# Altium PCB LMR14050.PcbDoc
Units mil, origin at the board's own origin, x right, y up, seen from the top; angles counter-clockwise.
Board outline 1355 x 1215 mil, 4 copper layers (Top Layer, GND1, GND2, Bottom Layer), stack 23.756 mil thick; 20 components, 9 nets, 47 pads, 214 vias.
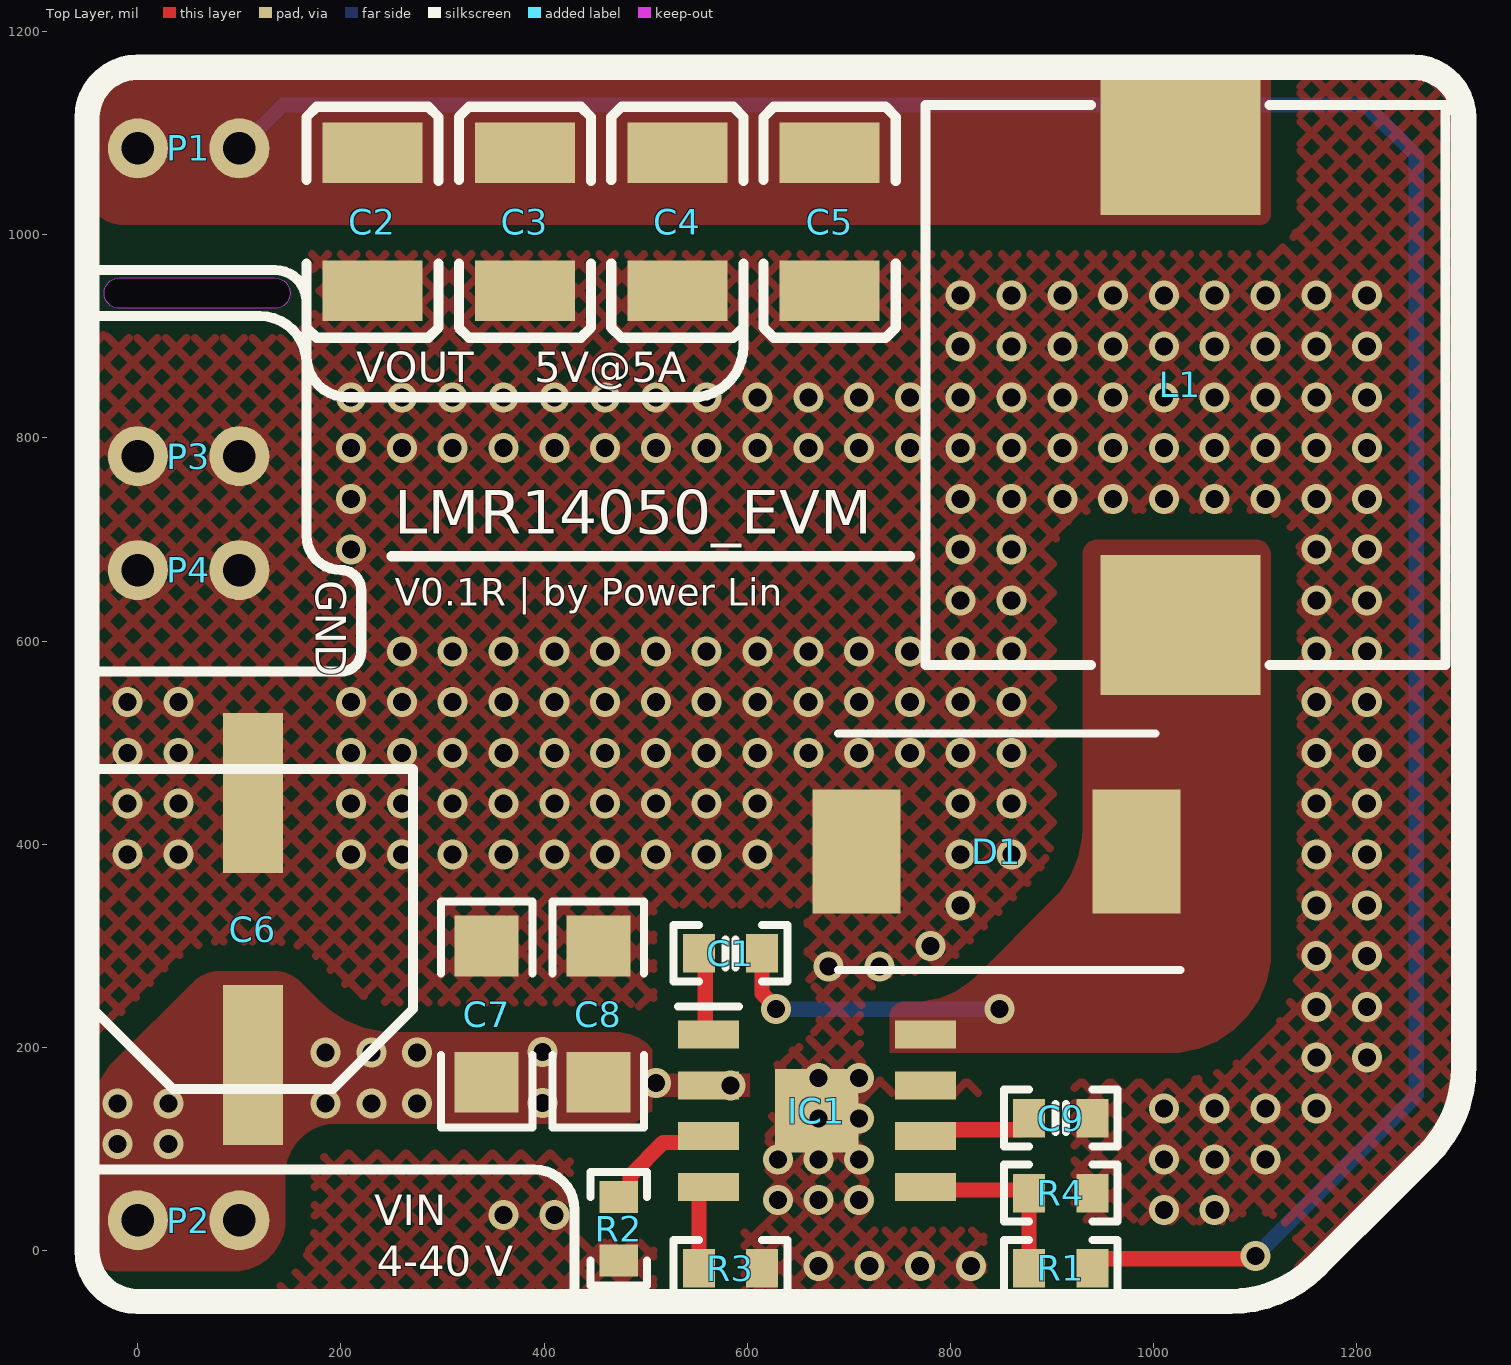
[diagram p0: Top Layer view]
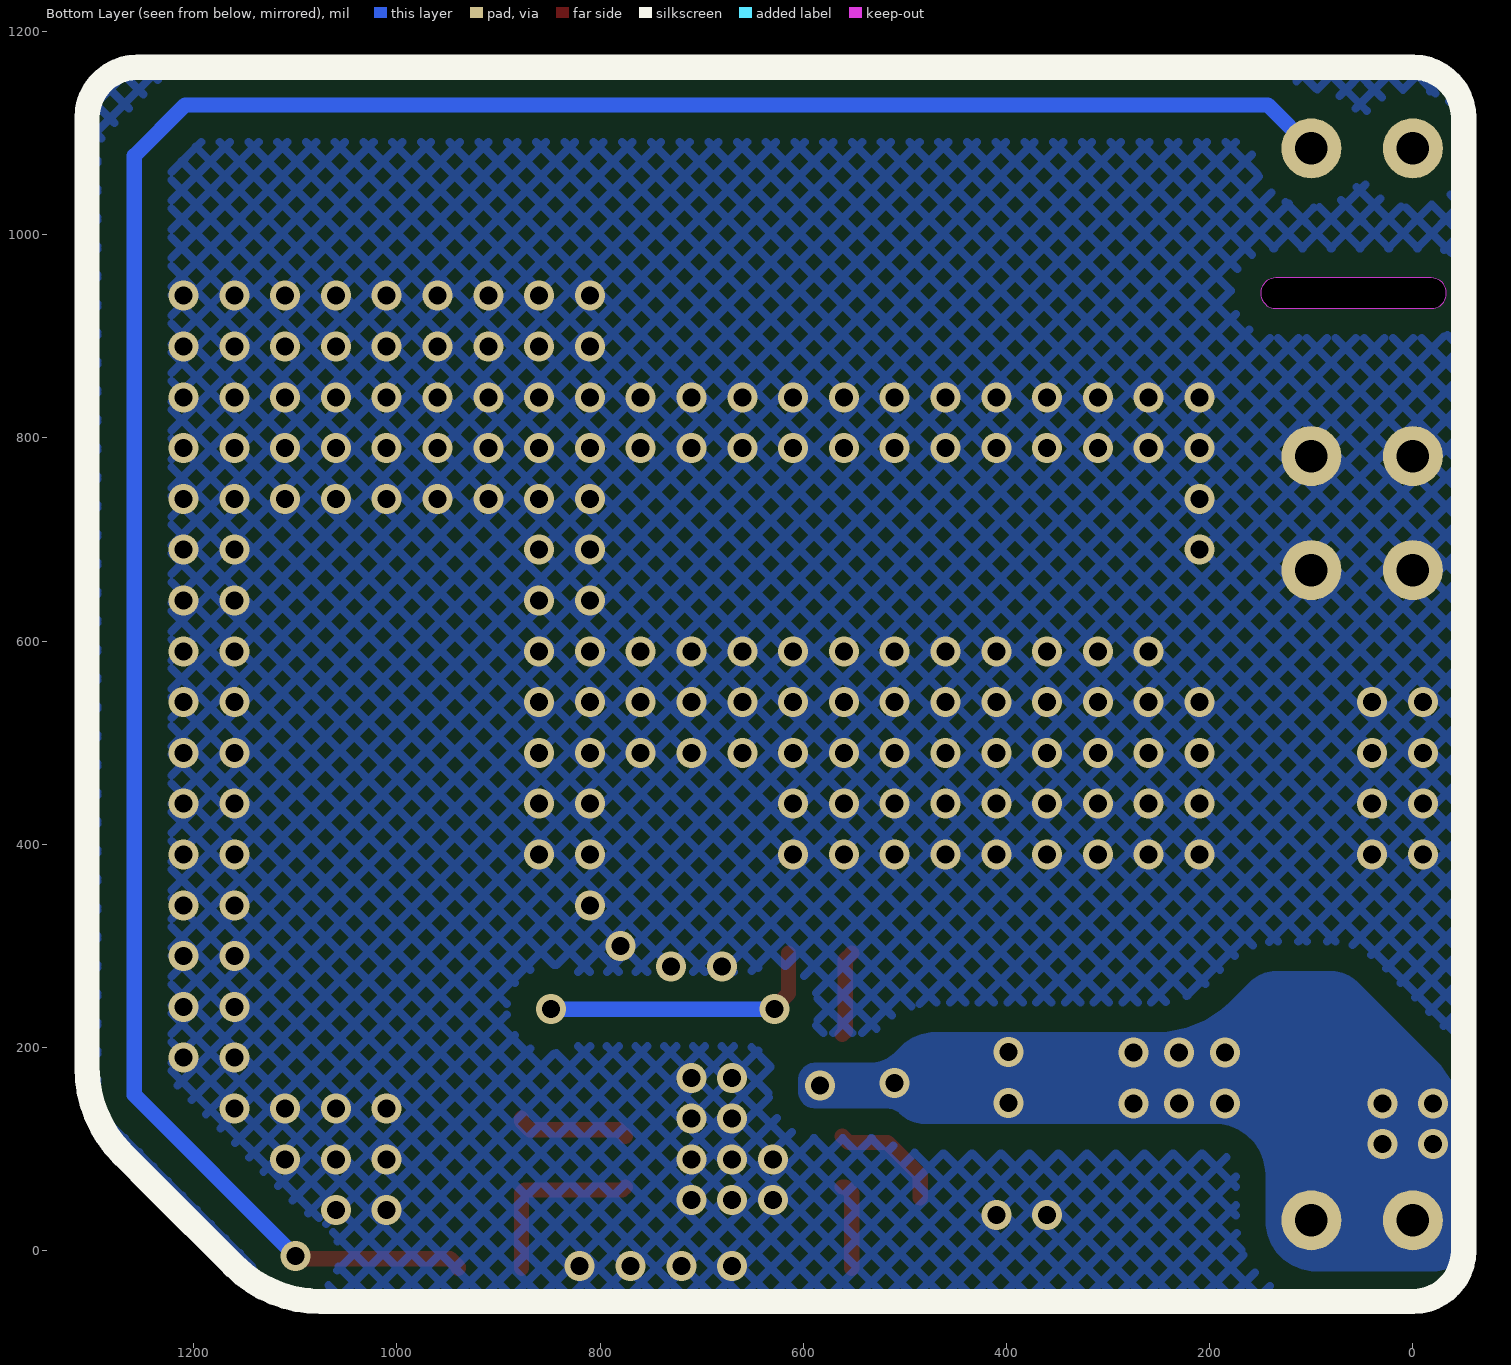
[diagram p1: Bottom Layer view, seen from below]
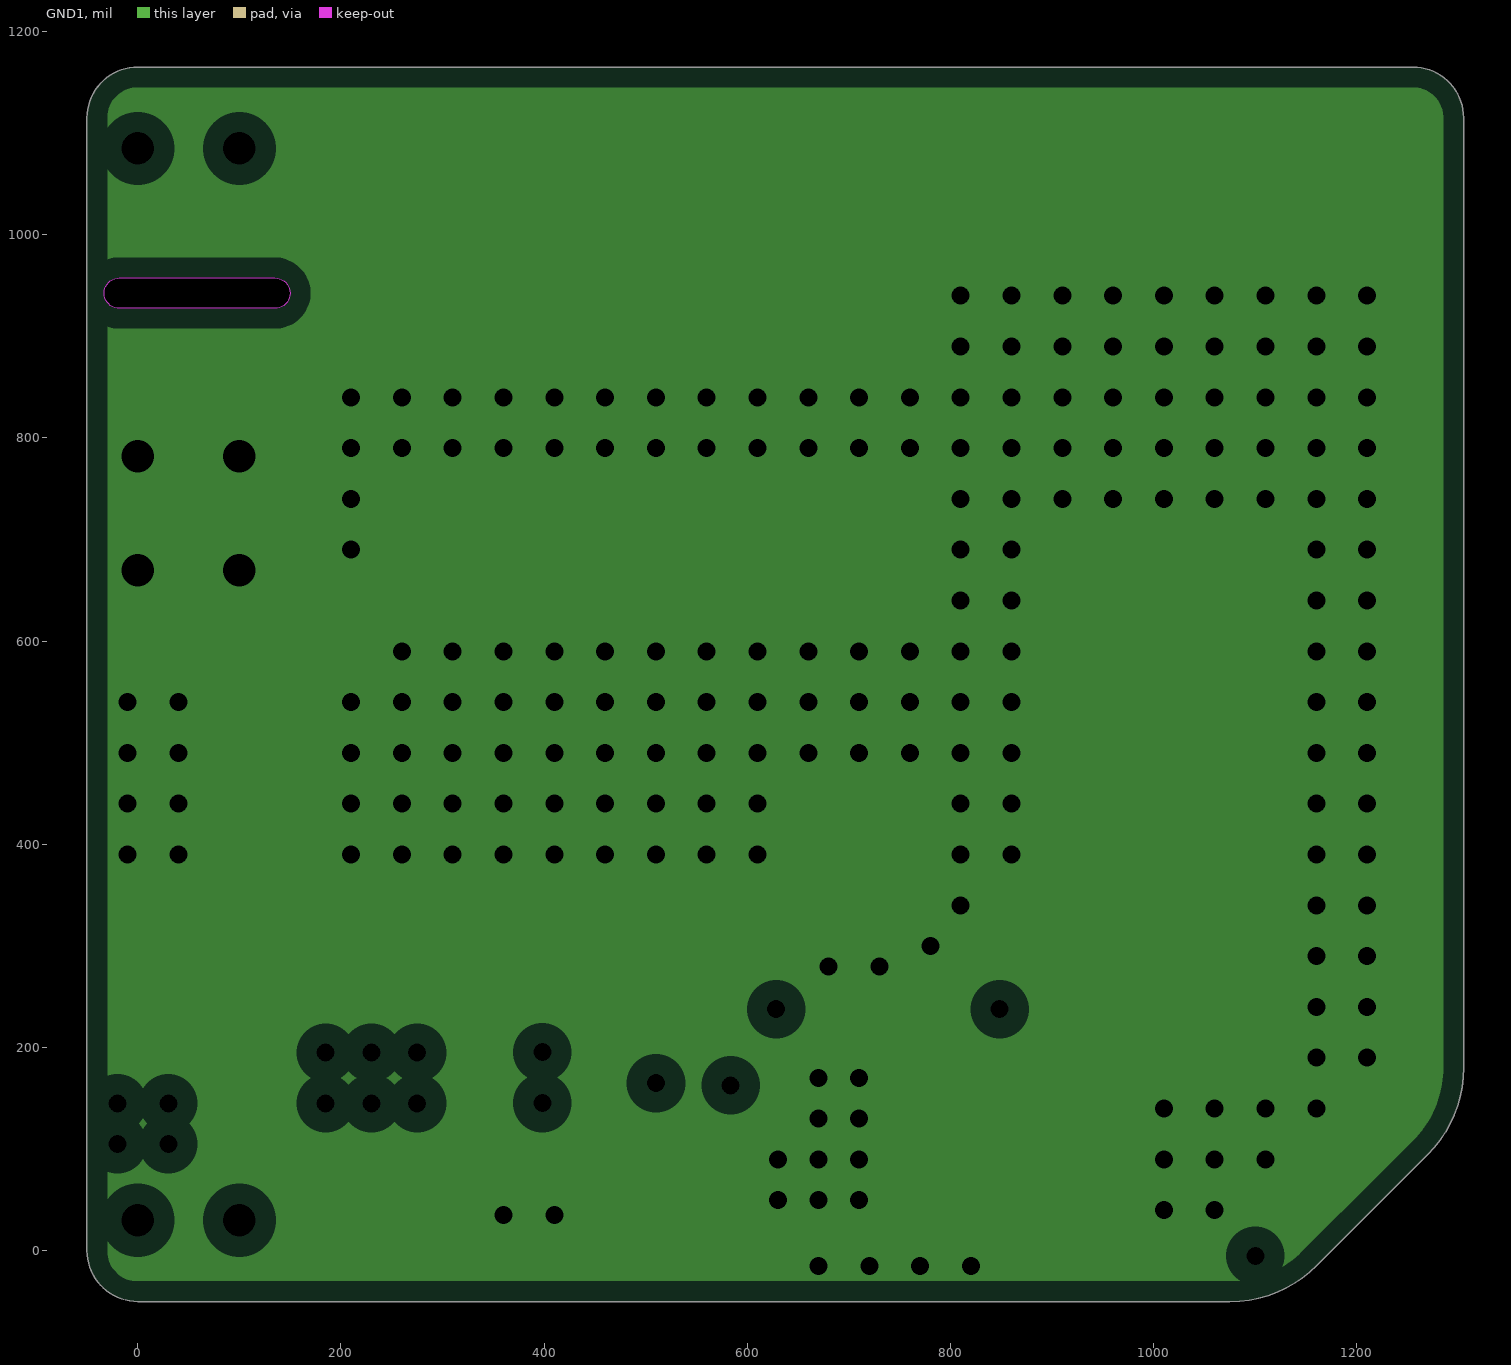
[diagram p2: GND1, clearances drawn from the general rule]
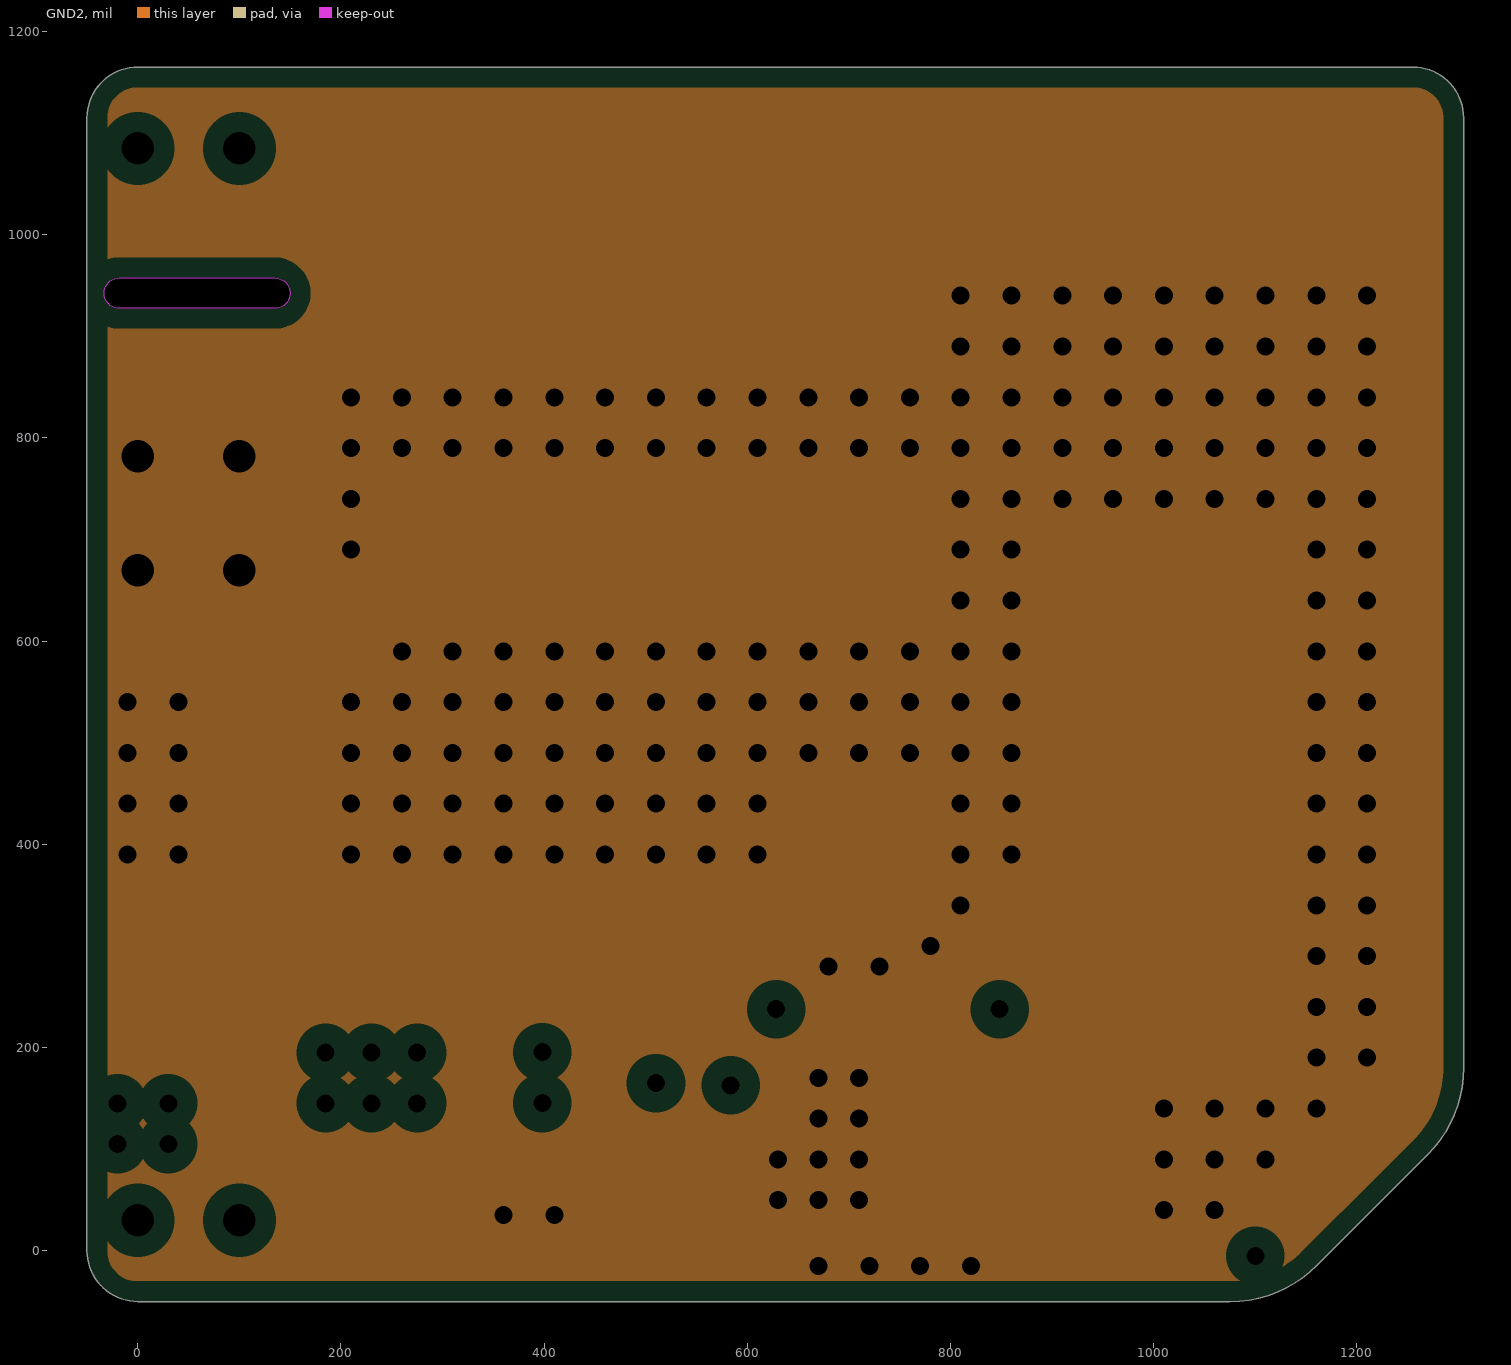
[diagram p3: GND2, clearances drawn from the general rule]
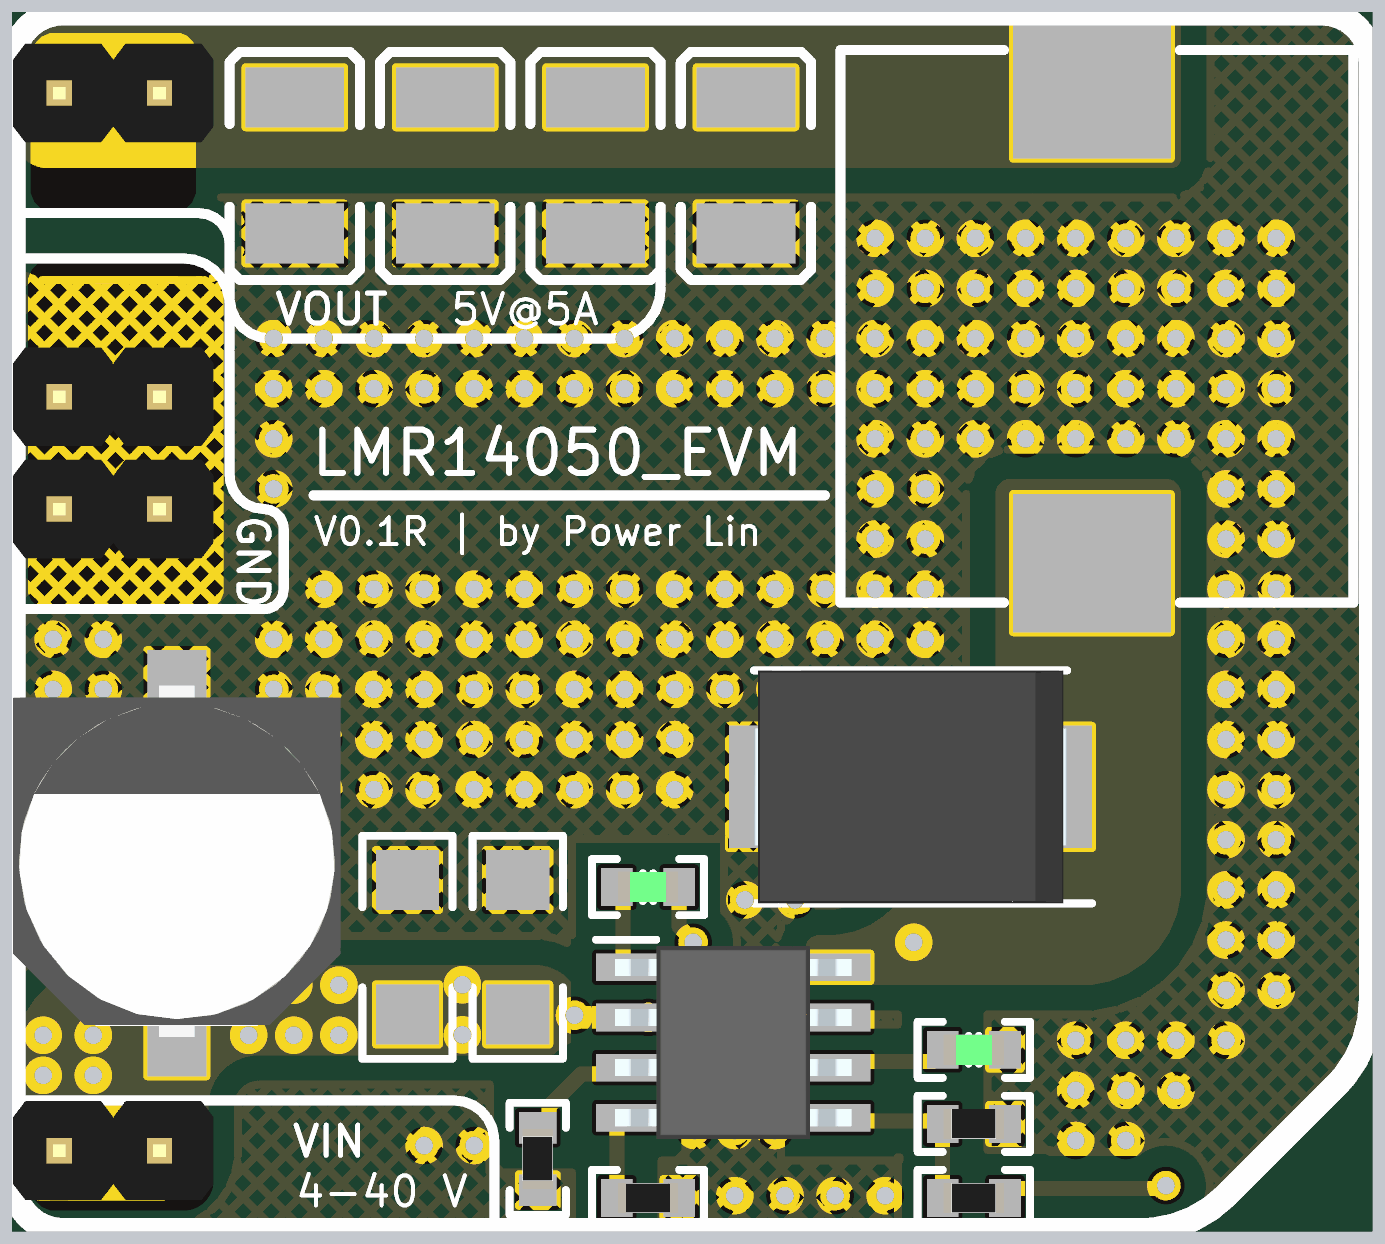
[diagram p4: 3D render of the assembled board from above, using the file's embedded part models]

## Layer stack, top to bottom
Top Solder: solder mask 0.4, Solder Resist, Dk 3.5
Top Layer: signal copper 1.4
Dielectric 2: prepreg 2.8, PP-006, Dk 4.1
GND1: plane copper 1.378, net GND
Dielectric 1: dielectric 12.6, FR-4, Dk 4.8
GND2: plane copper 1.378, net GND
Dielectric 3: prepreg 2.8, PP-006, Dk 4.1
Bottom Layer: signal copper 1.4
Bottom Solder: solder mask 0.4, Solder Resist, Dk 3.5

## Board outline
-50,0 ccw(c0,0) 0,-50 1075,-50 ccw(c1075,70.71) 1160.36,-14.64 1237.5,62.5 1269.64,94.64 ccw(c1184.29,180) 1305,180 1305,1115 ccw(c1255,1115) 1255,1165 0,1165 ccw(c0,1115) -50,1115
cut-out: -18.09,927.48 cw(c-18.09,942.48) -33.09,942.48 cw(c-18.09,942.48) -18.09,957.48 134.84,957.48 cw(c134.84,942.48) 149.84,942.48 cw(c134.84,942.48) 134.84,927.48

## Design rules (kind name [scope] priority, off if disabled: settings)
Clearance [All] p1: gap=10 ignorepadtopadclearanceinfootprint=FALSE except(0: Arc-Hole Track-Hole SMDPad-Hole THPad-Hole Via-Hole Fill-Hole Poly-Hole Region-Hole Text-Hole; 25: Arc-Fill Arc-Poly Arc-Region Track-Fill Track-Poly Track-Region SMDPad-Fill SMDPad-Poly SMDPad-Region THPad-Fill THPad-Poly THPad-Region Via-Fill Via-Poly Via-Region Fill-Fill Fill-Poly Fill-Region Poly-Poly Poly-Region Region-Region)
PlaneClearance [All] p1: clearance=20
PlaneConnect [All] p1: planeconnectstyle=Direct reliefexpansion=20 reliefentries=4 reliefconductorwidth=10 reliefairgap=10
PolygonConnect [All] p1: connectstyle=Direct reliefconductorwidth=10 reliefentries=4 polygonreliefangle="90 Angle" airgapwidth=10
RoutingVias [All] p1: holewidth=17.72 width=29.53 viastyle="Through Hole" minholewidth=17.72 minwidth=29.53 maxholewidth=17.72 maxwidth=29.53
SolderMaskExpansion [All] p1: expansion=4 istentingtop=FALSE
Width [All] p1: maxlimit=100 minlimit=10 preferedwidth=15
28 further rules are at their usual default settings.

## Components (designator, comment, footprint, x,y, rotation, side; value= is the part's Value field where it differs from the comment)
C1 "0.1uF/16V" CAP-0603 583.39,292.75 r0 top
C2 "47uF/16V" CAP-1210 231.01,1012.75 r270 top
C3 "47uF/16V" CAP-1210 381.02,1012.75 r270 top
C4 "47uF/16V" CAP-1210 531.03,1012.75 r270 top
C5 "47uF/16V" CAP-1210 681.04,1012.75 r270 top
C6 "47uF/63V" C_SMD-8X10 113.39,316.61 r180 top
C7 "2.2uF/100V" CAP-1206 343.39,232.75 r270 top
C8 "2.2uF/100V" CAP-1206 453.39,232.75 r270 top
C9 "22nF/16V" CAP-0603 908.39,130.52 r180 top
D1 "20V 5A 550mV@5A" DO-214AB/SMC 845.26,392.75 r180 top
IC1 "LMR14050SDDAR" HSOIC-8 668.39,137.75 r0 top
L1 "8.2uH@9.5A/13A" SMD-13.45x12.6x4.8mm 1016.36,851.13 r90 top
P1 "HDR1x2_2.54" HDR1X2_2.54_180 0,1085 r90 top
P2 "HDR1x2_2.54" HDR1X2_2.54_180 0,30 r90 top
P3 "HDR1x2_2.54" HDR1X2_2.54_180 0,782.01 r90 top
P4 "HDR1x2_2.54" HDR1X2_2.54_180 0,670 r90 top
R1 "100k" R-0603 908.39,-17.25 r0 top
R2 "0R" R-0603 473.39,21.65 r90 top
R3 "84.5k" R-0603 583.39,-17.25 r180 top
R4 "17.8k" R-0603 908.39,56.64 r180 top

## Footprints (in the part's own frame and the unit in brackets; to place one, negate y for a bottom-side part, rotate by r counter-clockwise, add the part's x,y. Pads: shape width x height; smd on the part's side, far side on the other; paste and mask are expansions set on the pad)
C_SMD-8X10 [mm]
  rect 1.5x4 smd: 1(0,3.4) 2(0,-3.4)
  silkscreen extent -4,-4 4,4, body extent -4.15,-4.5 4.15,4.4, height 10
CAP-0603 [mm]
  rect 0.8x0.96 smd: 1(-0.79,0) 2(0.79,0)
  silkscreen extent -1.42,-0.71 1.42,0.71, body extent -0.76,-0.39 0.76,0.39, height 0.9
CAP-1206 [mm] "贴片元件"
  rect 1.524x1.6 smd: 1(-1.703,0) 2(1.7,0)
  silkscreen extent -2.83,-1.14 2.83,1.14, body extent -1.91,-0.89 1.91,0.89, height 1
CAP-1210 [mm] "贴片电容"
  rect 1.52x2.5 smd: 1(1.725,0) 2(-1.725,0)
  silkscreen extent -2.88,-1.65 2.9,1.65, body extent -1.68,-1.27 1.63,1.27, height 1
DO-214AB/SMC [mm]
  rect 2.2x3.1 smd: 1(3.5,0) 2(-3.5,0)
  silkscreen extent -4.6,-2.95 3.97,2.95, body extent -3.97,-2.95 3.97,2.95, height 2.5
HDR1X2_2.54_180 [mm]
  round 1.5 hole 0.813: 1(0,0) 2(0,-2.54)
  body extent -1.25,-3.81 1.25,1.27, height 8.2
HSOIC-8 [mm]
  rect 1.525x0.7 smd: 1(-2.712,1.905) 2(-2.712,0.635) 3(-2.712,-0.635) 4(-2.712,-1.905) 5(2.712,-1.905) 6(2.712,-0.635) 7(2.712,0.635) 8(2.712,1.905)
  rect 2.09x2.09 smd: 9(0,0)
  silkscreen extent -3.47,2.61 -1.95,2.61, body extent -3,-2.45 3,2.45, height 1.65
R-0603 [mm]
  rect 0.8x0.96 smd: 1(-0.79,0) 2(0.79,0)
  silkscreen extent -1.42,-0.71 1.42,0.71, body extent -0.76,-0.38 0.76,0.38, height 0.41
SMD-13.45x12.6x4.8mm [mm]
  rect 3.5x4 smd: 1(-5.975,-0.25) 2(6.025,-0.25)
  silkscreen extent -6.98,-6.88 7.03,6.12, body extent -6.96,-6.88 7.01,6.08, height 5

## Part data
C1: library part CAP, "CC0603KRX7R7BB104", Package=0402, SuppliersPartNumber=C52923, ComponentLink1Description=供应商链接, ComponentLink1URL=http://www.szlcsc.com/product/details_53938.html, Supplier=LC
C2 C3 C4 C5: library part CAP, "C1210X5R476K160NT", Package=0402, SuppliersPartNumber=C52923, ComponentLink1Description=供应商链接, ComponentLink1URL=http://www.szlcsc.com/product/details_53938.html, Supplier=LC
C6: library part CAP-POL, "RVT1J470M0810", Package=3528, SuppliersPartNumber=C16133, ComponentLink1Description=供应商链接, ComponentLink1URL=http://www.szlcsc.com/product/details_16815.html, Supplier=LC
C7 C8: library part CAP, "CS3216X7R225K101NRI", Package=0402, SuppliersPartNumber=C52923, ComponentLink1Description=供应商链接, ComponentLink1URL=http://www.szlcsc.com/product/details_53938.html, Supplier=LC
C9: library part CAP, "CC0603KRX7R7BB223", Package=0402, SuppliersPartNumber=C52923, ComponentLink1Description=供应商链接, ComponentLink1URL=http://www.szlcsc.com/product/details_53938.html, Supplier=LC
D1: library part DIODE_Schottky, "SS52"
IC1: Manufacturer_Name="Texas Instruments", Mouser Part Number=595-LMR14050SDDAR, Arrow Part Number=LMR14050SDDAR, Arrow Price/Stock=https://www.arrow.com/en/products/lmr14050sddar/texas-instruments?region=nac, Datasheet Link=http://www.ti.com/lit/gpn/lmr14050, Height=1.7mm, Manufacturer_Part_Number=LMR14050SDDAR, Mouser Price/Stock=https://www.mouser.co.uk/ProductDetail/Texas-Instruments/LMR14050SDDAR?qs=G5PZsBocSXuzvyUQdQ5q2Q%3D%3D
L1: library part INDUCTOR, "MDE1250-8R2M", Package=0402, SuppliersPartNumber=C32041, ComponentLink1Description=供应商链接, ComponentLink1URL=http://www.szlcsc.com/product/details_33003.html, Supplier=LC
P1 P2 P3 P4: "Header"
R1: library part RES, "RC0603FR-07100KL", Package=0805, SuppliersPartNumber=C17798, Supplier=LC
R2: library part RES, "DNP", Package=0805, SuppliersPartNumber=C17798, Supplier=LC
R3: library part RES, "RC0603FR-0784K5L", Package=0805, SuppliersPartNumber=C17798, Supplier=LC
R4: library part RES, "RC0603FR-0717K8L", Package=0805, SuppliersPartNumber=C17798, Supplier=LC

## Via types
v1: diameter 29.53, hole 17.72, Top Layer to Bottom Layer, 214 vias

## Nets (pads, with @x,y where several pads share a name; then routed paths per layer and width w, separated by ;. In a path a pad name is that pad's centre, name@x,y a point inside that pad or via, vN(x,y) a via of type N, cw(c..) or ccw(c..) an arc to the next point about the centre after c; other vN are vias at no path point)
GND: C2.1 C3.1 C4.1 C5.1 C6.2 C7.1 C8.1 C9.1 D1.1 IC1.7 IC1.9 P3.1 P3.2 P4.1 P4.2 R2.1 R3.1 R4.1
  other v1: 670,-15 720,-15 770,-15 820,-15 360,35 410,35 1010,40 1060,40 630,50 670,50 710,50 630,90 670,90 710,90 1010,90 1060,90 1110,90 670,130 710,130 1010,140 1060,140 1110,140 1160,140 670,170 710,170 1160,190 1210,190 1160,240 1210,240 680,280 730,280 1160,290 1210,290 780,300 810,340 1160,340 1210,340 -10,390 40,390 210,390 260,390 310,390 360,390 410,390 460,390 510,390 560,390 610,390 810,390 860,390 1160,390 1210,390 -10,440 40,440 210,440 260,440 310,440 360,440 410,440 460,440 510,440 560,440 610,440 810,440 860,440 1160,440 1210,440 -10,490 40,490 210,490 260,490 310,490 360,490 410,490 460,490 510,490 560,490 610,490 660,490 710,490 760,490 810,490 860,490 1160,490 1210,490 -10,540 40,540 210,540 260,540 310,540 360,540 410,540 460,540 510,540 560,540 610,540 660,540 710,540 760,540 810,540 860,540 1160,540 1210,540 260,590 310,590 360,590 410,590 460,590 510,590 560,590 610,590 660,590 710,590 760,590 810,590 860,590 1160,590 1210,590 810,640 860,640 1160,640 1210,640 210,690 810,690 860,690 1160,690 1210,690 210,740 810,740 860,740 910,740 960,740 1010,740 1060,740 1110,740 1160,740 1210,740 210,790 260,790 310,790 360,790 410,790 460,790 510,790 560,790 610,790 660,790 710,790 760,790 810,790 860,790 910,790 960,790 1010,790 1060,790 1110,790 1160,790 1210,790 210,840 260,840 310,840 360,840 410,840 460,840 510,840 560,840 610,840 660,840 710,840 760,840 810,840 860,840 910,840 960,840 1010,840 1060,840 1110,840 1160,840 1210,840 810,890 860,890 910,890 960,890 1010,890 1060,890 1110,890 1160,890 1210,890 810,940 860,940 910,940 960,940 1010,940 1060,940 1110,940 1160,940 1210,940
NetC1_1: C1.1 IC1.1 | length 83.9
  Top Layer w15: C1.1 558.56,286.47 558.56,215.81 IC1.1
NetC1_2: C1.2 D1.2 IC1.8 L1.1 | length 280.8
  Top Layer w15: C1.2 614.49,253.25 628.39,239.35 v1(628.39,237.75)
  Bottom Layer w15: v1(628.39,237.75) v1(848.39,237.75)
NetC9_2: C9.2 IC1.6 | length 111.3
  Top Layer w15: IC1.6 781.41,119.01 868.92,119.01 877.28,127.37 C9.2
NetIC1_3: IC1.3 R2.2 | length 114.9
  Top Layer w15: R2.2@484.78,52.1 484.78,74.15 517.11,106.47 555.33,106.47 IC1.3
NetIC1_4: IC1.4 R3.2 | length 85.7
  Top Layer w15: R3.2 552.28,56.47 558.56,62.75 IC1.4
NetIC1_5: IC1.5 R1.1 R4.2 | length 178.5
  Top Layer w15: IC1.5 778.22,59.7 874.23,59.7 R4.2 R1.1
VIN: C6.1 C7.2 C8.2 IC1.2 P2.1 P2.2
  other v1: -20,105 30,105 -20,145 30,145 185,145 230,145 275,145 398.2,145.37 583.61,162.8 510,165 185,195 230,195 275,195 398.2,195.37
VOUT: C2.2 C3.2 C4.2 C5.2 L1.2 P1.1 P1.2 R1.2 | length 2511.5
  Top Layer w15: R1.2 939.49,-16.03 947.74,-7.78 1097.22,-7.78 v1(1100,-5)
  Bottom Layer w15: P1.2 142.75,1127.75 1208.39,1127.75 1258.39,1077.75 1258.39,153.39 v1(1100,-5)

## Polygon pours and split planes (outlines as drawn)
GND on Top Layer "NONET_L01_P-001" (hatched 45Degree grid 20 track 8, remove dead copper, pour order 5): 1305.02,1115.34 ccw(c1255.3,1115.34) 1255.3,1165.05 0.05,1165.05 ccw(c0.05,1115) -50,1115 -50,0 ccw(c0,0) 0,-50 1088.58,-50 ccw(c1088.58,50) 1159.29,-20.71 1280,100 ccw(c1219.6,160.4) 1305.02,160.4
VOUT on Top Layer "NONET_L01_P-001" (solid, pour order 3): 1105,1010 ccw(c1105,1020) 1115,1020 1115,1155 ccw(c1105,1155) 1105,1165 0,1165 ccw(c0,1115) -50,1115 -50,1045 ccw(c-15,1045) -15,1010
VIN on Top Layer "NONET_L01_P-001" (solid, pour order 1): 95,-20 ccw(c95,30) 145,30 145,75 cw(c195,75) 195,125 480.86,125 ccw(c480.86,159.14) 505,135 cw(c517.07,122.93) 517.07,140 587.93,140 ccw(c587.93,157.07) 600,145 ccw(c587.93,157.07) 605,157.07 605,167.93 ccw(c587.93,167.93) 600,180 ccw(c587.93,167.93) 587.93,185 534.14,185 cw(c534.14,219.14) 510,195 504.14,200.86 ccw(c470,166.72) 470,215 251.42,215 cw(c251.42,315) 180.71,244.29 160.61,264.39 ccw(c135,238.79) 135,275 80,275 ccw(c80,238.79) 54.39,264.39 -20.71,189.29 ccw(c50,118.58) -50,118.58 -50,2.07 ccw(c-32.93,2.07) -45,-10 ccw(c-20.86,14.14) -20.86,-20 90,-20
NetC1_2 on Top Layer "NONET_L01_P-001" (solid, pour order 0): 740,195 1015,195 ccw(c1015,295) 1115,295 1115,685 ccw(c1100,685) 1100,700 945,700 ccw(c945,685) 930,685 930,416.42 cw(c830,416.42) 900.71,345.71 824.75,269.75 cw(c765,329.5) 765,245 755,245 ccw(c755,230) 740,230
GND on Bottom Layer "NONET_L01_P-001" (hatched 45Degree grid 20 track 8, pour order 6): 1305.02,1115.34 ccw(c1255.3,1115.34) 1255.3,1165.05 0.05,1165.05 ccw(c0.05,1115) -50,1115 -50,0 ccw(c0,0) 0,-50 1088.58,-50 ccw(c1088.58,50) 1159.29,-20.71 1280,100 ccw(c1219.6,160.4) 1305.02,160.4
VIN on Bottom Layer "NONET_L01_P-001" (solid, pour order 2): 95,-20 ccw(c95,30) 145,30 145,75 cw(c195,75) 195,125 480.86,125 ccw(c480.86,159.14) 505,135 cw(c517.07,122.93) 517.07,140 587.93,140 ccw(c587.93,157.07) 600,145 ccw(c587.93,157.07) 605,157.07 605,167.93 ccw(c587.93,167.93) 600,180 ccw(c587.93,167.93) 587.93,185 534.14,185 cw(c534.14,219.14) 510,195 504.14,200.86 ccw(c470,166.72) 470,215 251.42,215 cw(c251.42,315) 180.71,244.29 160.61,264.39 ccw(c135,238.79) 135,275 80,275 ccw(c80,238.79) 54.39,264.39 -20.71,189.29 ccw(c50,118.58) -50,118.58 -50,2.07 ccw(c-32.93,2.07) -45,-10 ccw(c-20.86,14.14) -20.86,-20 90,-20
VIN on Top Solder "NONET_L01_P-001" (solid): 125,75 cw(c125,50) 150,50 150,0 cw(c120,0) 120,-30 100,-30 -7.5,-30 cw(c-7.5,-5) -32.5,-5 -32.5,47.5 cw(c-5,47.5) -5,75
GND on Top Solder "NONET_L01_P-001" (solid): -10,920 ccw(c-10,895) -35,895 -35,590 ccw(c-15,590) -15,570 140,570 ccw(c140,590) 160,590 160,895 ccw(c135,895) 135,920
VOUT on Top Solder "NONET_L01_P-001" (solid): -32.5,990 ccw(c-7.5,990) -7.5,965 107.5,965 ccw(c107.5,990) 132.5,990 132.5,1125 ccw(c112.5,1125) 112.5,1145 -7.5,1145 ccw(c-7.5,1120) -32.5,1120
no net on Bottom Solder "NONET_L01_P-001" (solid): 125,75 cw(c125,50) 150,50 150,0 cw(c120,0) 120,-30 100,-30 -7.5,-30 cw(c-7.5,-5) -32.5,-5 -32.5,47.5 cw(c-5,47.5) -5,75
GND on Bottom Solder "NONET_L01_P-001" (solid): -10,920 ccw(c-10,895) -35,895 -35,590 ccw(c-15,590) -15,570 140,570 ccw(c140,590) 160,590 160,895 ccw(c135,895) 135,920
VOUT on Bottom Solder "NONET_L01_P-001" (solid): -32.5,990 ccw(c-7.5,990) -7.5,965 107.5,965 ccw(c107.5,990) 132.5,990 132.5,1125 ccw(c112.5,1125) 112.5,1145 -7.5,1145 ccw(c-7.5,1120) -32.5,1120
GND on GND2 (split plane): 1263.72,1143.75 1269.16,1141.5 1274.06,1138.23 1278.23,1134.06 1281.5,1129.16 1283.75,1123.72 1284.9,1117.95 1284.9,1115 1284.9,180 1284.9,175.06 1283.93,165.22 1282.01,155.52 1279.14,146.06 1275.35,136.93 1270.69,128.21 1265.2,119.99 1258.93,112.35 1255.43,108.86 1223.29,76.71 1146.14,-0.43 1142.65,-3.93 1135.01,-10.2 1126.79,-15.69 1118.07,-20.35 1108.94,-24.14 1099.48,-27.01 1089.78,-28.93 1079.94,-29.9 -2.95,-29.9 -8.72,-28.75 -14.16,-26.5 -19.06,-23.23 -23.23,-19.06 -26.5,-14.16 -28.75,-8.72 -29.9,-2.95 -29.9,0 -29.9,909.39 -28.76,908.91 -26.14,908.12 -24.99,907.77 -21.07,907.38 137.82,907.38 141.74,907.77 143.5,908.3 145.51,908.91 151.03,911.2 152.64,912.06 154.5,913.05 157.55,915.55 161.77,919.77 164.26,922.82 165.13,924.44 166.12,926.29 168.41,931.81 169.55,935.58 169.94,939.5 169.94,942.48 169.94,945.46 169.55,949.39 168.41,953.16 166.12,958.67 165.13,960.53 164.26,962.14 161.77,965.19 157.55,969.41 155.36,971.2 154.5,971.91 151.54,973.49 151.03,973.76 145.51,976.05 141.74,977.19 137.82,977.58 -21.07,977.58 -24.99,977.19 -28.76,976.05 -29.9,975.58 -29.9,1115 -29.9,1117.95 -28.75,1123.72 -26.5,1129.16 -23.23,1134.06 -19.06,1138.23 -14.16,1141.5 -8.72,1143.75 -2.95,1144.9 1257.95,1144.9
GND on GND1 (split plane): 1263.72,1143.75 1269.16,1141.5 1274.06,1138.23 1278.23,1134.06 1281.5,1129.16 1283.75,1123.72 1284.9,1117.95 1284.9,1115 1284.9,180 1284.9,175.06 1283.93,165.22 1282.01,155.52 1279.14,146.06 1275.35,136.93 1270.69,128.21 1265.2,119.99 1258.93,112.35 1255.43,108.86 1223.29,76.71 1146.14,-0.43 1142.65,-3.93 1135.01,-10.2 1126.79,-15.69 1118.07,-20.35 1108.94,-24.14 1099.48,-27.01 1089.78,-28.93 1079.94,-29.9 -2.95,-29.9 -8.72,-28.75 -14.16,-26.5 -19.06,-23.23 -23.23,-19.06 -26.5,-14.16 -28.75,-8.72 -29.9,-2.95 -29.9,0 -29.9,909.39 -28.76,908.91 -26.14,908.12 -24.99,907.77 -21.07,907.38 137.82,907.38 141.74,907.77 143.5,908.3 145.51,908.91 151.03,911.2 152.64,912.06 154.5,913.05 157.55,915.55 161.77,919.77 164.26,922.82 165.13,924.44 166.12,926.29 168.41,931.81 169.55,935.58 169.94,939.5 169.94,942.48 169.94,945.46 169.55,949.39 168.41,953.16 166.12,958.67 165.13,960.53 164.26,962.14 161.77,965.19 157.55,969.41 155.36,971.2 154.5,971.91 151.54,973.49 151.03,973.76 145.51,976.05 141.74,977.19 137.82,977.58 -21.07,977.58 -24.99,977.19 -28.76,976.05 -29.9,975.58 -29.9,1115 -29.9,1117.95 -28.75,1123.72 -26.5,1129.16 -23.23,1134.06 -19.06,1138.23 -14.16,1141.5 -8.72,1143.75 -2.95,1144.9 1257.95,1144.9

## Silkscreen, mask and mechanical layers (free items; w line width, h text height)
Top Overlay:
  lines w10: -50,80 390,80 cw(c390,40) 430,40 430,-50 ; -50,570 200,570 ccw(c200,590) 220,590 220,650 ccw(c200,650) 200,670 cw(c200,703.99) 166.01,703.99 166.01,826.01 166.01,873.99 ; -50,920 120,920 cw(c120,873.99) 166.01,873.99 ; -48.65,965.18 135.18,965.18 cw(c135.18,934.35) 166.01,934.35 166.01,873.99 ; 166.01,880.72 ccw(c206.73,880.72) 206.73,840 546.03,840 ccw(c546.03,890) 596.03,890 596.03,940 ; 249.77,683.62 759.77,683.62
  lines w25: -50,0 ccw(c0,0) 0,-50 1075,-50 ccw(c1075,70.71) 1160.36,-14.64 1237.5,62.5 1269.64,94.64 ccw(c1184.29,180) 1305,180 1305,1115 ccw(c1255,1115) 1255,1165 0,1165 ccw(c0,1115) -50,1115 -50,0
  text "VOUT" at 215.02,855 h30
  text "5V@5A" at 390.02,855 h30
  text "LMR14050_EVM" at 252.6,705.71 h43
  text "GND" at 175,659.99 h30 r270
  text "V0.1R | by Power Lin" at 252.85,634.62 h27
  text "VIN" at 232.51,25 h30
  text "4-40 V" at 235.03,-25 h30
Bottom Overlay:
  the board outline again, w25
Mechanical 1:
  lines w10: -50,0 ccw(c0,0) 0,-50 1075,-50 ccw(c1075,70.71) 1160.36,-14.64 1237.5,62.5 1269.64,94.64 ccw(c1184.29,180) 1305,180 1305,1115 ccw(c1255,1115) 1255,1165 0,1165 ccw(c0,1115) -50,1115 -50,0 ; -33.09,942.48 cw(c-18.09,942.48) -18.09,957.48 134.84,957.48 cw(c134.84,942.48) 149.84,942.48 cw(c134.84,942.48) 134.84,927.48 -18.09,927.48 cw(c-18.09,942.48) -33.09,942.48